# EAGLE board vtol-hour-6 (EAGLE 9.7.0)

Size 576.37 x 211.01 mm. Coordinates in mm from the lower left corner, seen from the top.
Outline: 0,0 576.37,0 576.37,211.01 0,211.01 0,0
Copper layers (1*16): Top 0.035mm / dielectric 1.5mm / Bottom 0.035mm
Design rules "default": minimum track width 6mil, minimum drill 0.35mm, track to track 6mil, track to pad 6mil, pad to pad 6mil, via to via 6mil, smd to smd 6mil, copper to edge 40mil, drill to drill 6mil, minimum pad ring 10mil, minimum via ring 8mil, stop-mask expansion 4mil, vias tented up to drill 0mil, thermal gap 10mil

## Footprints (pad centres in the part's own frame; a part is rotated, then mirrored left to right if it is on the bottom)
BATTERY-GENERIC = drill 1.118 pad 3.15 octagon: + 2.54,0; - -2.54,0
MOTOR = drill 1.118 pad 3.15 octagon: + 2.54,0; - -2.54,0
PIEZO = drill 1 pad 1.6: 1 -3.5,0; 2 3.5,0
28015 = drill 1.016 long: 1 -2.54,0; 2 0,0; 3 2.54,0
HA-06-SM065 = drill 1 pad 1.676: 1 -2.54,-2.54; 2 0,2.54; 3 2.54,-2.54
SWITCH-SPDT-PTH-8.5X3.7MM = drill 1.016 pad 1.88: 1 -2.54,0; 2 0,0; 3 2.54,0
SG90 = drill 1.016 long: 1 -2.54,0; 2 0,0; 3 2.54,0
ARDUINO-UNO-R3-SHIELD = drill 1.016 pad 1.88: 3.3V 24.13,-2.54; 5V 24.13,0; A0 24.13,12.7; A1 24.13,15.24; A2 24.13,17.78; A3 24.13,20.32; A4 24.13,22.86; A5 24.13,25.4; AREF -24.13,-13.97; D2 -24.13,20.32; D3 -24.13,17.78; D4 -24.13,15.24; D5 -24.13,12.7; D6 -24.13,10.16; D7 -24.13,7.62; D8 -24.13,3.81; D9 -24.13,1.27; D10 -24.13,-1.27; D11 -24.13,-3.81; D12 -24.13,-6.35; D13 -24.13,-8.89; GND@0 24.13,2.54; GND@1 24.13,5.08; GND@2 -24.13,-11.43; IOREF 24.13,-7.62; NC 24.13,-10.16; RES 24.13,-5.08; RX -24.13,25.4; SCL -24.13,-19.05; SDA -24.13,-16.51; TX -24.13,22.86; VIN 24.13,7.62
LCD-I2C = drill 1.016 long: 1 -19.05,-5.08; 2 -19.05,-7.62; 3 -19.05,-10.16; 4 -19.05,-12.7

## Placement (x,y rotation side)
BAT2  9V  [BATTERY-GENERIC]  299.81,157.94 270 top
M1  MOTOR_HDR  [MOTOR]  237.64,166.14 0 top
M2  MOTOR_HDR  [MOTOR]  267.48,165.66 0 top
PIEZO1  PIEZO  [PIEZO]  156.73,193.89 0 top
PING1  DISTANCE-SENSOR-3PIN  [28015]  201.98,190.38 0 top
RPOT1  250k  [HA-06-SM065]  302.66,203.96 0 top
S1  TOGGLE  [SWITCH-SPDT-PTH-8.5X3.7MM]  340.06,108.35 30 top
SERVO3  SERVOSG90  [SG90]  156.42,84.74 0 top
SERVO4  SERVOSG90  [SG90]  207.74,90.08 0 top
U1  ARDUINO-UNO-R3-SHIELD  [ARDUINO-UNO-R3-SHIELD]  47.88,154.3 270 top
U2  LCD-16X2-I2CSUNFOUNDER-IIC  [LCD-I2C]  520.74,36.63 0 top
U3  ARDUINO-UNO-R3-SHIELD  [ARDUINO-UNO-R3-SHIELD]  430.64,29.95 270 top
UCHECK-ON-BOARD  LCD-16X2-I2CSUNFOUNDER-IIC  [LCD-I2C]  81.37,105.97 0 top

## Library data of the parts
BAT2 M1 M2 PIEZO1 PING1 RPOT1 S1 SERVO3 SERVO4 U1-U3 UCHECK-ON-BOARD = Tinkercad

## Nets
BAT2+: BAT2.+ PING1.2
BAT2-: BAT2.- M1.- PING1.1
U1_5V: SERVO3.2 SERVO4.2 U1.5V UCHECK-ON-BOARD.2
U1_D2: SERVO3.3 U1.D2
U1_D3: SERVO4.3 U1.D3
U1_D4: PIEZO1.1 U1.D4
U1_D8: PING1.3 U1.D8
U1_D9: M1.+ U1.D9
U1_GND: PIEZO1.2 SERVO3.1 SERVO4.1 U1.GND@0 U1.GND@1 U1.GND@2 U2.1 U3.GND@0 U3.GND@1 U3.GND@2 UCHECK-ON-BOARD.1
U1_RX: U1.RX U3.TX
U1_SCL: U1.SCL UCHECK-ON-BOARD.4
U1_SDA: U1.SDA UCHECK-ON-BOARD.3
U1_TX: U1.TX U3.RX
U3_5V: U2.2 U3.5V
U3_SCL: U2.4 U3.SCL
U3_SDA: U2.3 U3.SDA

## Tracks (layer width: path | path; a pad name or v marks a point on that pad's centre or on a via)
BAT2+  (1 unrouted)
BAT2-  (2 unrouted)
U1_5V  (3 unrouted)
U1_D2  (1 unrouted)
U1_D3  (1 unrouted)
U1_D4  (1 unrouted)
U1_D8  (1 unrouted)
U1_D9  (1 unrouted)
U1_GND  (10 unrouted)
U1_RX  (1 unrouted)
U1_SCL  (1 unrouted)
U1_SDA  (1 unrouted)
U1_TX  (1 unrouted)
U3_5V  (1 unrouted)
U3_SCL  (1 unrouted)
U3_SDA  (1 unrouted)